# Altium PCB linkit-v4-0.3_6layers_kimonly.PcbDoc (part 5 of 5)
Units mm, origin at the board's own origin, x right, y up, seen from the top; angles counter-clockwise.
Board outline 70 x 35 mm, 6 copper layers (Top Layer, Int1 (GND), Int2 (Sign), Int3 (Sign), Int4 (PWR), Bottom Layer), stack 1.636 mm thick; 194 components, 149 nets, 738 pads, 717 vias.
Unrouted connection lines stored in the file: 1.
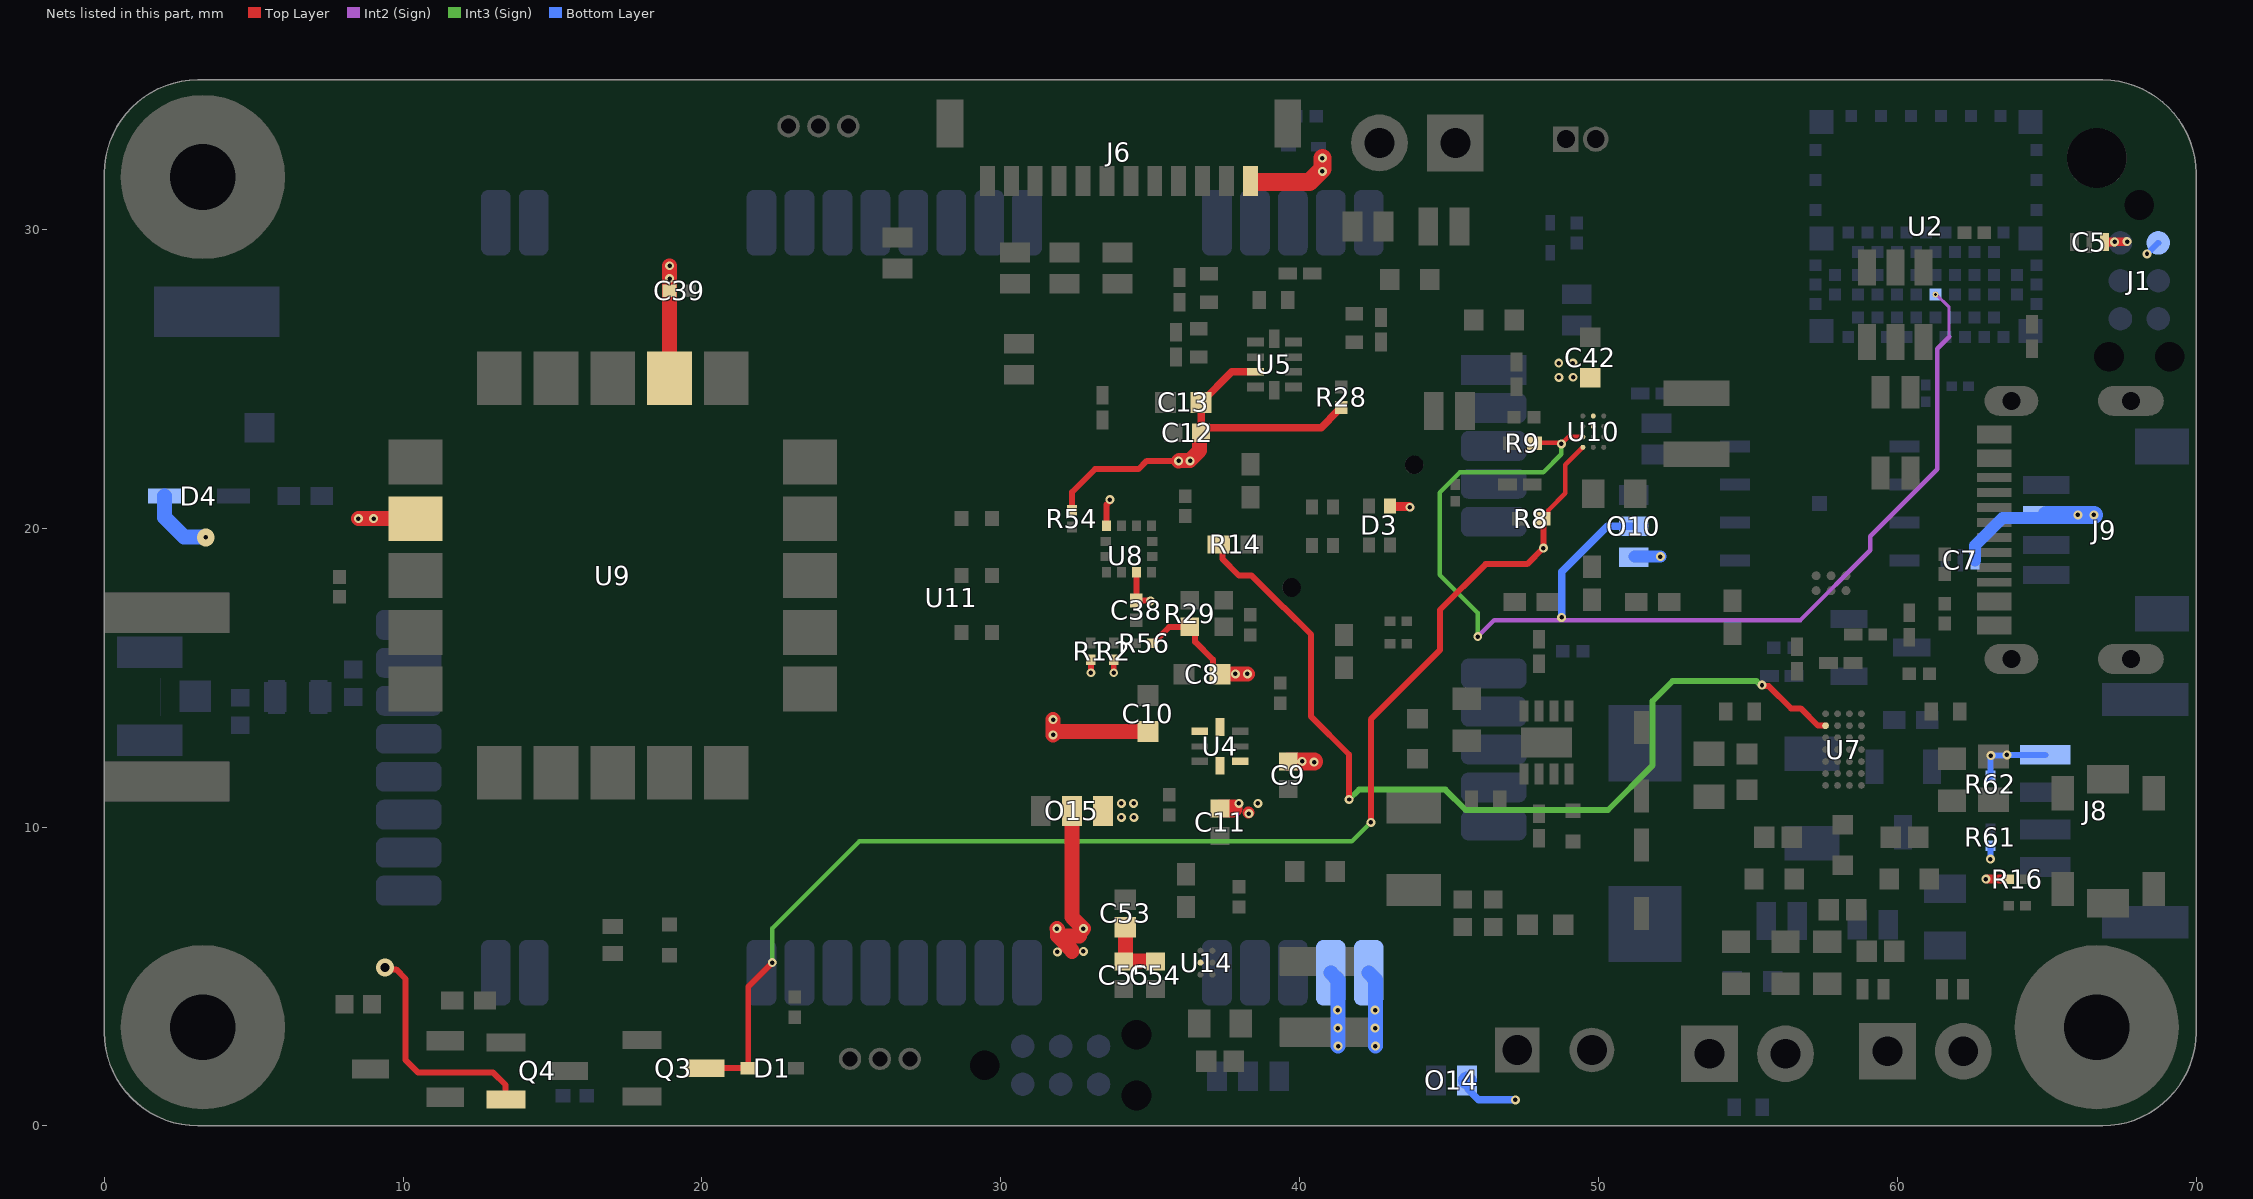
[diagram p8: the nets of this part, all layers, seen from the top]

## Via types
v1: diameter 0.3, hole 0.15, Int1 (GND) to Int3 (Sign), tented both sides, 165 vias
v2: diameter 0.3, hole 0.15, Top Layer to Int1 (GND), tented both sides, 113 vias
v3: diameter 0.3, hole 0.15, Top Layer to Int4 (PWR), tented both sides, 69 vias
v4: diameter 0.3, hole 0.15, Top Layer to Int3 (Sign), tented both sides, 64 vias
v5: diameter 0.3, hole 0.15, Int1 (GND) to Int2 (Sign), tented both sides, 39 vias
v6: diameter 0.6, hole 0.15, Int1 (GND) to Bottom Layer, tented both sides, 35 vias
v7: diameter 0.4/0.4/0.4/0.4 (per signal layer), hole 0.2, Top Layer to Bottom Layer, tented both sides, 31 vias
v8: diameter 0.3, hole 0.15, Int1 (GND) to Bottom Layer, tented both sides, 28 vias
v9: diameter 0.3, hole 0.15, Top Layer to Int2 (Sign), tented both sides, 21 vias
v10: diameter 0.3, hole 0.15, Int3 (Sign) to Bottom Layer, tented both sides, 20 vias
v11: diameter 0.3, hole 0.15, Int2 (Sign) to Int3 (Sign), tented both sides, 18 vias
v12: diameter 0.3, hole 0.15, Int4 (PWR) to Bottom Layer, tented both sides, 16 vias
v13: diameter 0.3, hole 0.15, Int2 (Sign) to Bottom Layer, tented both sides, 15 vias
v14: diameter 0.25, hole 0.1, Int3 (Sign) to Bottom Layer, tented both sides, 15 vias
v15: diameter 0.5, hole 0.2, Top Layer to Bottom Layer, tented both sides, 12 vias
v16: diameter 0.25, hole 0.1, Int2 (Sign) to Bottom Layer, tented both sides, 12 vias
v17: diameter 0.25, hole 0.1, Top Layer to Bottom Layer, tented both sides, 8 vias
v18: diameter 0.2, hole 0.1, Int2 (Sign) to Bottom Layer, tented both sides, 7 vias
v19: diameter 0.226, hole 0.1, Top Layer to Int3 (Sign), tented both sides, 6 vias
v20: diameter 0.4, hole 0.2, Top Layer to Bottom Layer, tented both sides, 6 vias
v21: diameter 0.6, hole 0.3, Top Layer to Bottom Layer, tented both sides, 4 vias
v22: diameter 0.25, hole 0.1, Int1 (GND) to Bottom Layer, tented both sides, 4 vias
v23: diameter 0.6, hole 0.15, Top Layer to Int2 (Sign), tented both sides, 2 vias
v24: diameter 0.6, hole 0.15, Int3 (Sign) to Bottom Layer, tented both sides, 2 vias
v25: diameter 0.3, hole 0.15, Top Layer to Bottom Layer, tented both sides, 2 vias
v26: diameter 0.6, hole 0.15, Int4 (PWR) to Bottom Layer, tented both sides, 1 vias
v27: diameter 0.25, hole 0.1, Int2 (Sign) to Int3 (Sign), tented both sides, 1 vias
v28: diameter 0.169, hole 0.1, Top Layer to Int2 (Sign), tented both sides, 1 vias

## Nets (pads, with @x,y where several pads share a name; then routed paths per layer and width w, separated by ;. In a path a pad name is that pad's centre, name@x,y a point inside that pad or via, vN(x,y) a via of type N, cw(c..) or ccw(c..) an arc to the next point about the centre after c; other vN are vias at no path point) (continued)
VCC_SEL: R9.1 U2.52 U10.B3 | length 36.2
  Top Layer w0.15: R9.1@47.864,22.837 47.882,22.855 48.723,22.855 v4(48.759,22.819) 48.999,23.058 U10.B3@49.461,23.058
  Int2 (Sign) w0.1: v18@61.308,27.824 61.737,27.395 61.737,26.403
  Int2 (Sign) w0.15: v11(45.962,16.374) 46.515,16.928 56.762,16.928 59.097,19.262 59.097,19.727 61.341,21.971 61.341,25.745 61.341,26.006 61.737,26.403 ; v18(61.285,27.824) v18@61.308,27.824
  Int3 (Sign) w0.15: v11(45.962,16.374) 45.962,17.163 44.683,18.442 44.683,20.228 44.683,20.666 44.683,21.188 45.368,21.873 48.162,21.873 48.759,22.47 v4(48.759,22.819)
VSAT: C53.2 C54.2 C55.2 O10.2 O15.2 U11.11@42.315,5.124 U11.12@41.045,5.124 U14.B2 | length 17.8
  Top Layer w0.5: v3(31.877,6.604) 31.896,6.585 31.896,6.358 32.385,5.869 32.385,5.842 ; 32.131,6.35 32.631,6.35 32.631,6.442 v3@32.76,6.571 ; O15.2@32.385,10.541 32.385,6.985 v3(32.766,6.604) ; C55.2@34.113,5.506 34.13,5.523 35.162,5.523 C54.2@35.179,5.54 ; C55.2@34.12,5.506 34.17,5.556 C53.2@34.17,6.645
  Bottom Layer w0.25: v12@48.787,17.037 v12(48.768,17.018) 48.768,18.542 50.292,20.066 O10.2@51.181,20.066
  Bottom Layer w0.5: U11.12@41.045,5.124 41.287,4.882 v12(41.287,2.669) ; U11.11@42.315,5.124 42.537,4.902 v12(42.537,2.669)
  other v3: 31.896,5.823 32.766,5.842
  other v12: 41.281,3.271 42.531,3.271 41.275,3.874 42.525,3.874
VSENS_1: C8.1 C12.2 C13.1 R28.1 R29.2 R54.2 R56.2 U4.4 U5.8 | length 18.8
  Top Layer w0.2: R54.2@32.385,20.6 32.385,21.209 33.157,21.981 34.618,21.981 34.887,22.251 v3(35.956,22.251) ; R56.2@35.078,16.155 35.098,16.155 35.638,16.695 R29.2@36.322,16.695 36.509,16.508 36.509,16.196 37.103,15.602 37.103,15.348 C8.1@37.338,15.113 ; C12.2@36.703,23.189 C12.2@36.705,23.191 ; R28.1@41.282,23.924 41.292,23.924 41.402,24.034 R28.1@41.402,24.044
  Top Layer w0.25: C12.2@36.705,23.191 C12.2@36.705,23.193 ; U5.8@38.521,25.228 37.726,25.228 C13.1@36.705,24.207 C12.2@36.705,23.193 ; R28.1@41.282,23.924 40.726,23.368 36.88,23.368 C12.2@36.705,23.193
  Top Layer w0.5: v3(35.956,22.251) 35.975,22.27 36.331,22.27 36.655,22.594 36.655,23.141 C12.2@36.703,23.189 ; C8.1@37.338,15.113 37.351,15.126 v3(38.257,15.126)
  other v3: 37.849,15.126 36.339,22.251
VSENS_2: C10.1 C39.1 D4.2 U4.5 U9.2 U9.17 | length 11.8
  Top Layer w0.5: v3(8.509,20.32) 10.413,20.32 U9.2@10.418,20.315 ; U9.17@18.918,25.015 18.918,27.952 v3(18.918,28.782) ; v3(31.75,13.596) v3(31.75,13.081) 31.873,13.204 34.825,13.204 34.829,13.2 C10.1@34.925,13.2
  Bottom Layer w0.5: D4.2@2.023,21.074 2.023,20.36 2.671,19.712 3.38,19.712 v26(3.399,19.693)
  other v3: 9.017,20.32 18.918,28.35
VSYS: C5.1 C7.1 C9.2 C11.2 C38.2 C42.1 D3.1 J1.1 J6.1 J8.1 J9.2 O10.3 O14.1 O15.3 Q4.2 R1.2 R2.2 R16.2 R61.2 R62.1 U4.1 U4.8 U8.3 U8.10 U10.C2 U10.D2 | length 29.2
  Top Layer w0.2: v21(9.39,5.306) 9.459,5.238 9.77,5.238 10.091,4.917 10.091,2.197 10.496,1.792 13.009,1.792 13.428,1.373 13.428,0.903 Q4.2@13.441,0.89 ; v3(33.02,15.163) R1.2@33.02,15.595 ; U8.10@33.54,20.079 33.54,20.786 33.655,20.901 v3(33.655,20.955) ; R2.2@33.772,15.571 33.782,15.561 v3(33.782,15.163) ; U8.3@34.54,18.529 34.54,17.586 C38.2@34.537,17.582 34.545,17.573 35.008,17.573 v3(35.017,17.564) ; C9.2@39.624,12.2 C9.2@39.632,12.192 ; v3(67.273,29.579) v3@67.279,29.585 ; v3@67.685,29.585 v3(67.691,29.591)
  Top Layer w0.252: R2.2@33.772,15.571 33.772,15.585 R2.2@33.782,15.595 ; R16.2@63.554,8.255 R16.2@63.728,8.255
  Top Layer w0.3: R2.2@33.772,15.572 R2.2@33.788,15.589 ; D3.1@43.022,20.742 43.043,20.721 43.668,20.721 v3(43.688,20.701) ; v3@63.007,8.255 R16.2@63.554,8.255 ; C5.1@66.929,29.576 66.929,29.579 v3(67.273,29.579) ; v3@67.279,29.585 v3@67.685,29.585
  Top Layer w0.4: v3@38.283,10.485 v3@38.298,10.485
  Top Layer w0.5: O15.3@33.426,10.541 33.426,10.696 O15.3@33.507,10.776
  Top Layer w0.6: C11.2@37.338,10.62 37.798,10.62 ; J6.1@38.404,31.582 40.334,31.582 40.767,32.015 v3(40.767,32.385) ; C9.2@39.632,12.192 39.639,12.199 v3@40.491,12.199
  Bottom Layer w0.2: O10.3@51.181,19.025 O10.3@51.206,19.05 ; R62.1@63.059,11.639 63.119,11.699 R62.1@63.119,11.71 63.127,11.718 63.127,12.383 v12(63.135,12.391) 63.145,12.401 63.658,12.401 v12(63.668,12.411) 64.948,12.411 J8.1@64.952,12.416 ; v12(63.119,8.927) R61.2@63.119,9.372 R61.2@63.119,9.352 ; v12(68.356,29.18) 68.363,29.18 68.729,29.546 J1.1@68.736,29.546
  Bottom Layer w0.25: O14.1@45.636,1.494 45.636,1.222 45.987,0.871 v12(47.223,0.871)
  Bottom Layer w0.4: O10.3@51.206,19.05 v12(52.07,19.05) ; C7.1@62.603,18.923 62.603,19.423 63.519,20.339 64.887,20.339 J9.2@64.987,20.439
  Bottom Layer w0.6: O14.1@45.606,1.524 O14.1@45.636,1.494 ; J9.2@64.987,20.439 v12@66.579,20.439
  other v3: 62.962,8.255 34.038,10.327 34.452,10.327 38.303,10.451 34.036,10.795 34.451,10.795 37.973,10.795 38.608,10.795 40.491,12.175 40.087,12.199 48.677,25.048 49.152,25.051 48.673,25.524 49.149,25.527 40.767,31.943
  other v12: 66.04,20.447 66.579,20.442
VSYS_EN: D1.1 Q3.3 R8.2 U10.A3 | length 44.3
  Top Layer w0.15: R8.2@48.175,20.32 48.177,20.32 48.327,20.47 48.327,20.596 48.895,21.164 48.895,22.124 U10.A3@49.478,22.707
  Top Layer w0.2: Q3.3@20.1,1.93 D1.1@21.552,1.93 21.552,4.662 v4(22.355,5.465) ; v4(42.383,10.155) 42.383,13.606 44.696,15.919 44.696,17.264 46.228,18.796 47.617,18.796 v9(48.158,19.337) 48.165,19.344 48.165,20.307 R8.2@48.152,20.32
  Int3 (Sign) w0.15: v4(22.355,5.465) 22.355,6.607 25.273,9.525 41.753,9.525 v4(42.383,10.155)
WIRELESS_NCHG_LED: R14.1 U7.F4 | length 30.6
  Top Layer w0.2: R14.1@37.296,19.457 37.414,19.339 37.414,18.974 37.973,18.415 38.395,18.415 39.458,17.352 39.476,17.352 40.386,16.442 40.386,13.696 41.656,12.426 v4(41.656,10.922) ; v4(55.474,14.751) 55.512,14.713 55.7,14.713 56.443,13.97 56.769,13.97 57.347,13.392 U7.F4@57.601,13.392
  Int3 (Sign) w0.2: v4(41.656,10.922) 41.987,11.253 44.877,11.253 45.559,10.572 50.323,10.572 51.816,12.065 51.816,14.219 52.482,14.885 55.286,14.885 55.419,14.751 v4(55.474,14.751)
pads on no net: J1.H1 J1.H2 J1.H3 J4.A8 J4.B8 J9.S1 J9.S2 J12.H1 J12.H2 J12.H3 MEC1.1 MEC1.2 MH1.0 Q5.B1 Q5.B2 U2.15 U2.59 U2.65 U2.66 U2.67 U2.68 U2.69 U2.70 U2.71 U2.72 U2.73 U2.74 U2.75 U2.76 U2.77 U2.78 U8. U8.4 U8.11 U11.1@45.895,25.294 U11.2@45.895,24.024 U11.3@45.895,22.754 U11.4@45.895,21.484 U11.5@45.895,20.214 U11.6@45.895,15.134 U11.7@45.895,13.864 U11.8@45.895,12.594 U11.9@45.895,11.324 U11.10@45.895,10.054 U11.11@42.315,5.724 U11.12@41.045,5.724 U11.13@39.775,5.724 U11.14@38.505,5.724 U11.15@37.235,5.724 U11.16@30.884,5.724 U11.17@29.615,5.724 U11.18@28.345,5.724 U11.19@27.074,5.724 U11.20 U11.21@24.535,5.724 U11.22 U11.23 U11.24@14.375,5.724 U11.25 U11.26@10.795,7.874 U11.27 U11.28 U11.29@10.795,11.684 U11.30@10.795,12.954 U11.31@10.795,14.224 U11.32@10.795,15.494 U11.33@10.795,16.764 U11.34@13.105,29.624 U11.35@14.375,29.624 U11.36@21.995,29.624 U11.37@23.265,29.624 U11.38@24.535,29.624 U11.39@25.805,29.624 U11.40@27.075,29.624 U11.41@28.345,29.624 U11.42@29.615,29.624 U11.43@30.885,29.624 U11.44 U11.45@38.505,29.624 U11.46 U11.47@41.045,29.624 U11.48

## Polygon pours and split planes (outlines as drawn)
GND on Bottom Layer "BOTGND" (solid, remove dead copper, pour order 4): 0,33.113 0,1.778 1.905,-0.127 67.945,-0.127 70.104,1.905 70,33.224 68.58,34.874 1.454,34.874
GND on Top Layer "TOPGND" (solid, remove dead copper, pour order 0): 0,2.032 1.651,0 68.143,0 70,1.858 70,33.142 68.081,35.061 1.506,35 0,33.274
GND on Int2 (Sign) "L2_GND" (solid, remove dead copper, pour order 2): 0.001,33.009 -0.108,1.924 1.817,0 68.072,0 70,2.113 70,33.332 68.326,35.052 1.723,35.001
GND on Int3 (Sign) "L3_GND" (solid, remove dead copper, pour order 3): 0,33.098 0,1.655 1.882,0 68.072,0 70,2.032 70,33.191 68.487,35.001 1.767,35
VSYS on Int4 (PWR) (split plane): 239 vertices, not listed, extent 0.509,0.509 69.491,34.491
GND on Int4 (PWR) (split plane): 13.006,10.244 12.997,10.235 0.51,10.235 0.51,13.416 11.916,13.416 11.916,14.627 11.916,15.266 0.51,15.261 0.51,18.848 8.972,18.848 9.024,18.855 9.073,18.875 9.114,18.907 9.464,19.257 10.061,19.257 10.113,19.264 10.162,19.284 10.203,19.316 10.684,19.796 13.006,22.119
VSENS_2 on Int4 (PWR) (split plane): 32.383,17.37 32.383,12.983 32.174,12.775 31.072,12.775 30.174,13.673 30.174,16.032 30.167,16.084 30.147,16.132 30.115,16.174 18.841,27.448 18.799,27.48 18.751,27.5 18.699,27.507 17.907,27.507 17.855,27.5 17.806,27.48 17.764,27.448 10.398,20.082 9.977,19.661 9.381,19.661 9.328,19.654 9.28,19.634 9.238,19.601 8.888,19.252 0.51,19.252 0.51,21.561 0.719,21.769 8.89,21.769 8.942,21.776 8.991,21.796 9.033,21.828 16.975,29.77 19.982,29.77
VSAT on Int4 (PWR) (split plane): 49.393,17.378 49.393,16.912 45.831,13.351 45.799,13.309 45.779,13.26 45.772,13.208 45.772,7.958 43.291,5.477 43.259,5.435 43.239,5.386 43.232,5.334 43.232,2.257 40.664,2.257 38.383,4.537 38.341,4.569 38.293,4.589 38.241,4.596 36.758,4.596 36.17,5.184 36.128,5.216 36.079,5.237 36.027,5.243 31.806,5.243 30.973,6.076 30.973,7.545 42.018,7.545 42.07,7.552 42.118,7.572 42.16,7.604 44.084,9.528 44.116,9.57 44.136,9.619 44.143,9.671 44.143,13.248 48.727,17.832 48.938,17.832
VBAT on Int4 (PWR) (split plane): 43.727,26.092 43.769,26.06 43.817,26.04 43.87,26.033 45.945,26.033 49.455,22.522 49.455,21.717 49.455,21.665 49.462,21.613 49.482,21.564 49.514,21.522 50.682,20.354 50.682,15.407 48.244,12.97 48.212,12.928 48.192,12.879 48.185,12.827 48.185,11.176 48.192,11.124 48.212,11.075 48.244,11.033 49.006,10.271 49.048,10.239 49.097,10.219 49.149,10.212 57.15,10.212 57.202,10.219 57.251,10.239 57.293,10.271 58.631,11.609 61.782,11.609 61.782,10.233 61.747,10.228 61.698,10.208 61.657,10.176 58.716,7.235 49.705,7.235 49.653,7.228 49.605,7.208 49.563,7.176 45.831,3.445 45.799,3.403 45.779,3.354 45.772,3.302 45.772,0.511 6.933,0.511 6.933,2.71 7.084,2.862 9.308,2.862 9.36,2.869 9.408,2.889 9.45,2.921 11.916,5.386 31.092,5.386 31.58,4.899 31.621,4.867 31.67,4.847 31.722,4.84 35.943,4.84 36.531,4.252 36.573,4.22 36.622,4.2 36.674,4.193 38.157,4.193 40.437,1.913 40.479,1.88 40.528,1.86 40.58,1.853 43.434,1.853 43.486,1.86 43.535,1.88 43.577,1.913 43.609,1.954 43.629,2.003 43.636,2.055 43.636,5.25 46.117,7.731 46.149,7.773 46.155,7.787 46.169,7.822 46.176,7.874 46.176,13.124 49.737,16.686 49.769,16.728 49.79,16.777 49.796,16.829 49.796,17.461 49.79,17.513 49.769,17.562 49.737,17.604 49.165,18.177 49.123,18.209 49.074,18.229 49.022,18.236 48.644,18.236 48.591,18.229 48.557,18.215 48.543,18.209 48.501,18.177 47.944,17.619 45.541,20.023 45.541,22.225 45.534,22.277 45.514,22.326 45.482,22.368 43.577,24.273 43.535,24.305 43.486,24.325 43.434,24.332 41.74,24.332 35.762,30.31 35.762,30.904 36.152,31.294 38.524,31.294
VSENS_1 on Int4 (PWR) (split plane): 37.898,21.633 37.898,18.479 37.898,16.418 37.905,16.366 37.925,16.317 37.957,16.275 38.66,15.572 38.66,14.562 38.143,14.045 38.057,14.045 36.651,15.451 36.651,17.081 36.644,17.134 36.624,17.182 36.592,17.224 35.524,18.292 35.524,22.912 36.619,22.912
VBUS on Int4 (PWR) (split plane): 64.949,23.538 64.949,21.166 60.07,16.286 57.574,13.791 56.853,13.791 54.177,16.467 54.177,18.948 59.406,18.948 59.458,18.954 59.507,18.975 59.549,19.007 64.216,23.674 64.813,23.674
VBUS on Int1 (GND) (split plane): 60.13,30.095 60.123,30.043 60.123,29.555 60.13,29.503 60.15,29.454 60.182,29.412 60.377,29.217 60.377,28.448 60.377,25.897 60.384,25.845 60.404,25.796 60.436,25.754 62.649,23.541 62.691,23.509 62.739,23.489 62.792,23.482 64.497,23.482 65.053,22.927 65.053,21.841 63.331,21.841 59.13,26.042 59.13,29.623 59.123,29.675 59.103,29.724 59.071,29.765 59.03,29.797 59.03,30.099 60.132,30.099
AGND on Int1 (GND) (split plane): 42.814,29.037 42.814,27.859 41.191,26.237 36.66,26.237 36.465,26.432 35.762,27.135 35.762,28.872 36.406,29.516 42.334,29.516
PGND1 on Int1 (GND) (split plane): 48.498,27.289 48.54,27.257 48.589,27.237 48.641,27.23 51.097,27.23 52.122,26.205 52.122,20.658 51.605,20.141 47.328,20.141 46.049,21.42 46.049,26.713 47.201,27.865 47.922,27.865
PGND2 on Int1 (GND) (split plane): 40.438,9.187 40.438,7.568 38.481,7.568 38.429,7.561 38.38,7.541 38.338,7.509 37.449,6.62 37.417,6.578 37.397,6.529 37.39,6.477 37.39,2.624 36.619,1.853 34.882,1.853 33.301,3.434 33.301,4.955 33.301,5.837 33.417,5.953 33.449,5.995 33.469,6.044 33.476,6.096 33.476,7.917 35.263,9.704 39.921,9.704
GND on Int1 (GND) (split plane): 3.125,34.49 51.943,34.49 51.943,30.099 58.826,30.099 58.826,29.797 58.785,29.765 58.753,29.724 58.733,29.675 58.726,29.623 58.726,25.959 58.733,25.907 58.753,25.858 58.785,25.816 63.105,21.497 63.147,21.465 63.195,21.445 63.247,21.438 65.255,21.438 65.307,21.445 65.355,21.465 65.397,21.497 65.429,21.539 65.449,21.587 65.456,21.639 65.456,23.01 65.449,23.063 65.435,23.097 65.429,23.111 65.397,23.153 64.724,23.827 64.682,23.859 64.633,23.879 64.581,23.886 62.875,23.886 60.781,25.98 60.781,28.448 60.781,29.301 60.774,29.353 60.754,29.402 60.722,29.443 60.526,29.639 60.526,30.043 60.52,30.093 60.525,30.099 69.49,30.099 69.49,3.125 69.491,3.113 69.482,2.92 69.452,2.691 69.402,2.466 69.333,2.247 69.245,2.034 69.138,1.829 69.015,1.635 68.874,1.452 68.718,1.282 68.548,1.126 68.366,0.986 68.171,0.862 67.967,0.755 67.754,0.667 67.534,0.598 67.309,0.548 67.08,0.518 66.885,0.509 66.875,0.51 3.125,0.511 3.115,0.51 2.92,0.518 2.691,0.548 2.466,0.598 2.247,0.668 2.034,0.756 1.829,0.862 1.635,0.986 1.452,1.126 1.282,1.282 1.126,1.452 0.986,1.635 0.862,1.829 0.755,2.034 0.667,2.247 0.598,2.467 0.548,2.692 0.518,2.92 0.509,3.115 0.51,3.126 0.51,3.301 0.51,3.304 0.51,31.875 0.509,31.885 0.518,32.081 0.548,32.309 0.598,32.534 0.667,32.754 0.756,32.967 0.862,33.171 0.986,33.366 1.126,33.549 1.282,33.719 1.452,33.874 1.635,34.015 1.829,34.139 2.034,34.245 2.247,34.333 2.466,34.403 2.691,34.453 2.92,34.483 3.113,34.491

## Other copper
Top Layer:
  rectangle net VSYS: 33.383,10.196 34.606,10.916
  rectangle net VSYS: 37.701,10.27 38.771,10.956
  rectangle net VBUS: 54.438,18.012 55.189,18.703
  pour cut-out: 46.863,24.765 46.848,24.75 46.848,23.542 49.699,23.542 49.655,24.765
  pour cut-out: 58.551,18.875 56.999,18.875 56.999,17.464 58.531,17.464
  pour cut-out: 59.759,14.039 59.781,14.017 59.781,11.669 56.769,11.669 56.769,14.017
  region net NetC58_1: 46.468,11.237 47.421,12.115 47.575,12.115 47.633,11.443 46.906,10.593 46.455,10.593
  pour cut-out: 43.815,6.394 39.301,6.394 39.382,3.938 39.382,3.828 43.815,3.828
  pour cut-out: 54.582,23.895 52.337,23.895 52.337,23.232 52.474,23.095 54.582,23.095
  region net VSYS: 49.911,23.4 49.911,23.801 49.911,24.205 50.074,24.368 50.074,25.29 49.285,25.623 49.227,25.681 48.499,25.681 48.499,25.458 48.499,25.235 48.499,24.938 49.05,24.788 49.167,24.754 49.455,24.501 49.746,24.211 49.746,23.4
  region net PGND4: 47.777,13.325 47.776,13.326 46.121,13.326 45.97,13.175 46.023,13.123 46.023,12.546 46.028,12.546 46.244,12.331 47.724,12.331
  region net NetC2_2: 47.498,13.589 47.169,13.918 45.793,13.918 45.793,14.17 45.909,14.608 47.388,14.608 47.631,14.365 47.631,13.709
  region net VSAT: 36.684,5.461 36.684,5.562 36.348,5.562 36.104,5.806 35.4,5.806 35.393,5.207 36.206,5.207 36.347,5.361 36.424,5.361 36.688,5.361
  region net NetC23_1: 57.514,11.702 57.988,11.702 58.001,11.896 57.58,11.896 56.854,11.896 56.388,11.43 56.388,7.747 57.377,6.902 57.785,6.985 57.514,7.469 57.023,7.874 57.023,11.176 57.111,11.442 57.331,11.662
  region net GND: 57.938,13.857 58.089,14.008 58.089,14.672 58.149,14.732 58.877,14.732 58.877,14.357 58.486,13.966 58.45,13.832 58.402,13.751 58.402,13.792 58.204,13.892 58.024,13.787
  region net VBAT: 45.402,24.319 45.212,24.55 45.212,25.4 46.162,25.4 46.162,24.625 45.855,24.319
  region net VSENS_2: 36.663,13.2 36.401,13.462 35.941,13.462 35.854,13.549 34.983,13.549 34.983,13.121 35.254,12.85 35.71,12.85 35.969,13.109 36.521,13.109
  region net LX2: 50.178,23.836 50.678,24.178 51.689,24.511 52.196,24.929 52.447,24.929 52.592,24.201 51.245,23.727 50.808,23.707 50.178,23.678
  pour cut-out: 51.943,30.099 51.943,35.306 69.85,35.306 69.85,30.226 69.977,30.099
  region net COIL-2: 58.867,11.703 58.405,11.709 58.396,11.903 58.822,11.903 59.548,11.903 60.014,11.436 60.014,7.753 58.895,6.9 58.617,6.991 58.822,7.5 59.379,7.88 59.379,11.182 59.291,11.448 59.071,11.668
  region net VSAT: 34.417,6.858 33.655,6.858 33.401,7.112 31.877,7.112 31.546,6.781 31.546,5.665 32.004,5.207 32.766,5.207 33.782,6.223 34.036,6.223 34.29,6.35
  region net VSYS: 37.338,12.05 37.338,11.901 37.489,11.75 37.489,11.068 37.638,10.918 37.638,10.499 37.04,10.499 37.04,10.927 37.188,11.075 37.188,12.058
  region net VSYS: 38.013,12.2 38.138,12.075 38.598,12.075 38.772,11.901 39.693,11.901 39.693,12.279 39.474,12.498 38.754,12.498 38.581,12.325 38.208,12.325
  region net VSENS_1: 37.338,13.35 37.338,13.499 37.187,13.65 37.187,14.332 36.989,14.531 36.989,14.901 37.66,14.901 37.687,14.875 37.687,14.524 37.488,14.325 37.488,13.342
  region net VBAT: 36.998,5.028 37.001,4.543 37.438,4.204 37.695,3.883 37.695,2.159 38.255,2.159 38.738,2.642 39.738,2.642 39.738,3.507 38.498,3.883 38.141,4.368 37.526,4.759 37.149,5.084
  region net NetL5_2: 37.096,5.463 37.096,5.38 37.345,5.38 38.508,5.015 39.692,5.015 39.692,5.993 39.69,5.994 38.213,5.994 37.345,5.537 37.096,5.537
  region net LX1: 50.177,22.632 50.658,22.309 51.741,22.19 52.201,22.068 52.502,22.085 52.62,22.89 51.98,22.894 51.279,22.828 51.056,22.791 50.397,22.791 50.177,22.791
  region net VBAT: 49.747,22.71 49.745,22.707 49.745,22.258 49.454,21.967 49.454,18.711 50.202,18.711 50.202,21.963 49.912,22.254 49.912,22.705
  region net VBUS: 57.513,13.775 57.066,14.222 57.066,14.792 57.823,14.792 57.823,14.075 57.694,13.946 57.694,13.768
  region net VBUS: 58.557,18.661 58.312,18.661 58.166,18.506 58.142,18.393 58.144,18.393 58.241,18.268 58.453,18.167 58.537,18.163
  region net RX-OUT: 58.805,12.496 58.802,12.493 56.062,12.493 55.672,12.102 54.703,12.102 54.703,12.182 55.314,12.793 56.803,12.793 56.905,12.691 58.809,12.691 58.801,12.682 58.801,12.592
  region net PGND3: 57.705,11.441 58.891,11.441 58.891,10.068 58.459,9.636 57.951,9.636 57.51,10.076 57.51,11.364
Int2 (Sign):
  pour cut-out: 51.943,30.099 51.943,35.306 69.85,35.306 69.85,30.226 69.977,30.099
Int3 (Sign):
  region net NetC23_1: 54.86,6.815 54.502,6.457 53.054,7.941 53.518,8.169
  pour cut-out: 51.943,30.099 51.943,35.306 69.85,35.306 69.85,30.226 69.977,30.099
Bottom Layer:
  rectangle net NetC49_2: 3.447,13.854 4.087,14.903
  pour cut-out: 6.707,13.576 6.247,13.576 6.247,15.126 6.707,15.126
  pour cut-out: 2.54,15.367 2.54,13.335 0.508,13.335 0.508,15.367
  region net GND: 9.411,15.414 8.177,15.424 7.547,15.368 7.639,15.276 7.865,15.276 7.865,15.024 9.507,15.024 9.653,15.161
  pour cut-out: 51.943,30.099 51.943,35.306 69.85,35.306 69.85,30.226 69.977,30.099
  pour cut-out: 57.46,26.472 64.587,26.472 64.587,29.572 64.46,29.699 57.46,29.699
  pour cut-out: 11.176,29.056 11.176,6.223 17.272,6.223 45.339,6.223 45.339,29.21
Int1 (GND) (plane layer: these items are gaps in the copper):
  pour cut-out: 51.943,30.099 51.943,35.306 69.85,35.306 69.85,30.226 69.977,30.099
  lines w0.2: 58.928,29.623 58.928,30.48 59.055,30.607 59.309,30.607 60.579,30.607 60.579,30.297 60.325,30.043
  lines w0.4: 58.928,29.623 58.928,25.959 63.247,21.639 65.255,21.639 65.255,23.01 64.581,23.684 62.792,23.684 60.579,25.897 60.579,28.448 60.579,29.301 60.325,29.555 60.325,30.043 ; 33.099,3.35 33.099,4.955 33.099,5.921 33.274,6.096 33.274,8.001 35.179,9.906 40.005,9.906 40.64,9.271 40.64,7.366 38.481,7.366 37.592,6.477 37.592,2.54 36.703,1.651 34.798,1.651 33.099,3.35 ; 35.56,27.051 36.322,26.289 36.576,26.035 41.275,26.035 43.016,27.776 43.016,29.12 42.418,29.718 36.322,29.718 35.56,28.956 35.56,27.051 ; 45.847,21.336 47.244,19.939 51.689,19.939 52.324,20.574 52.324,26.289 51.181,27.432 48.641,27.432 48.006,28.067 47.117,28.067 45.847,26.797 45.847,21.336
Int4 (PWR) (plane layer: these items are gaps in the copper):
  region: 58.404,22.328 56.404,22.328 56.404,19.328 58.404,19.328
  region: 57.277,30.48 57.277,24.556 65.024,24.556 65.024,25.908 65.024,30.353
  pour cut-out: 51.943,30.099 51.943,35.306 69.85,35.306 69.85,30.226 69.977,30.099
  pour cut-out: -0.381,15.261 11.916,15.266 11.916,14.627 11.916,13.416 -0.381,13.416
  lines w0.4: 0,10.033 13.081,10.033 13.208,10.16 13.208,22.479 ; 6.223,0 6.731,0 6.731,2.794 7,3.063 9.308,3.063 11.832,5.588 31.115,5.588 ; 45.974,-0.064 45.974,3.302 49.705,7.033 58.8,7.033 61.799,10.033 61.984,10.033 61.984,11.811 58.547,11.811 57.15,10.414 51.943,10.414 49.149,10.414 48.387,11.176 48.387,12.827 50.884,15.324 50.884,20.438 49.657,21.665 ; 47.879,17.399 45.339,19.939 45.339,22.225 43.434,24.13 41.656,24.13 35.56,30.226 35.56,30.988 36.068,31.496 38.608,31.496 43.87,26.234 46.029,26.234 49.657,22.606 ; 49.657,21.665 49.657,21.717 49.657,22.606 ; 49.657,21.665 49.657,22.606 ; 0.254,19.05 8.972,19.05 9.381,19.459 10.061,19.459 10.541,19.939 17.907,27.305 18.699,27.305 29.972,16.032 29.972,13.589 30.988,12.573 32.258,12.573 32.585,12.9 32.585,17.453 20.066,29.972 16.891,29.972 8.89,21.971 2.032,21.971 0.635,21.971 0.254,21.59 0.254,19.05 ; 30.771,5.993 31.722,5.042 36.027,5.042 36.674,4.395 38.241,4.395 40.58,2.055 43.434,2.055 43.434,5.334 45.974,7.874 45.974,13.208 49.595,16.829 49.595,17.461 49.022,18.034 48.644,18.034 43.941,13.332 43.941,9.671 42.018,7.747 35.814,7.747 30.771,7.747 30.771,5.993 ; 35.322,18.208 36.449,17.081 36.449,15.367 37.973,13.843 38.227,13.843 38.862,14.478 38.862,15.656 38.1,16.418 38.1,18.479 38.1,21.717 36.703,23.114 35.814,23.114 35.322,23.114 35.322,18.208 ; 53.975,16.383 53.975,19.149 59.406,19.149 64.133,23.876 64.897,23.876 65.151,23.622 65.151,21.082 60.213,16.144 57.658,13.589 56.769,13.589 53.975,16.383

## Silkscreen, mask and mechanical layers (free items; w line width, h text height)
Top Overlay:
  drawing of 108 lines, arcs and shapes, not listed
  text "-" at 42.926,35.071 h0.8 r180
  text "+" at 45.72,34.931 h0.8 r180
  text "1" at 39.266,30.122 h1
  text "Argos Linkit V4.0" at 7.239,7.493 h2.5
  text "Reed switch" at 8.001,4.826 h1
  text "UART GPS" at 24.123,3.295 h0.8
  text "+" at 51.087,2.109 h1
  text "+" at 59.203,0.017 h1
  text "-" at 56.161,-0.294 h1.52
  text "-" at 62.097,-0.319 h1.52
Bottom Overlay:
  lines w0.15: 51.96,34.486 51.96,30.094 56.731,30.094 ; 65.189,30.094 67.308,30.094 ; 67.624,30.094 68.578,30.094 ; 68.894,30.094 69.925,30.094
  text "SAT UART" at 21.978,32.505 h0.8
  text "-" at 46.609,0 h1.52
  text "+" at 49.276,0 h1.52
Bottom Paste:
  rectangle: 3.4,13.852 4.126,14.902
Mechanical 3:
  drawing of 366 lines, arcs and shapes, not listed
  text "Layer" at 4.036,102.362 h1.52
  text "Name" at 10.405,102.362 h1.52
  text "Material" at 26.639,102.362 h1.52
  text "Thickness" at 38.636,102.362 h1.52
  text "Constant" at 47.723,102.362 h1.52
  text "Board Layer Stack" at 56.138,102.362 h1.52
  text "Top Overlay" at 10.405,99.314 h1.52
  text "Top Solder" at 10.405,96.266 h1.52
  text "SM-003" at 26.639,96.266 h1.52
  text "0,025mm" at 38.636,96.266 h1.52
  text "4" at 47.723,96.266 h1.52
  text "Top Surface Finish" at 10.405,93.218 h1.52
  text "Nickel, Gold" at 26.639,93.218 h1.52
  text "0,004mm" at 38.636,93.218 h1.52
  text "1" at 4.036,90.17 h1.52
  text "Top Layer" at 10.405,90.17 h1.52
  text "CF-004" at 26.639,90.17 h1.52
  text "0,035mm" at 38.636,90.17 h1.52
  text "Dielectric 1" at 10.405,87.122 h1.52
  text "S1000-2MB" at 26.639,87.122 h1.52
  text "0,050mm" at 38.636,87.122 h1.52
  text "4.25" at 47.723,87.122 h1.52
  text "Dielectric 2" at 10.405,84.074 h1.52
  text "S1000-2MB" at 26.639,84.074 h1.52
  text "0,050mm" at 38.636,84.074 h1.52
  text "4.25" at 47.723,84.074 h1.52
  text "2" at 4.034,81.026 h1.52
  text "Int1 (GND)" at 10.405,81.026 h1.52
  text "CF-004" at 26.639,81.026 h1.52
  text "0,018mm" at 38.636,81.026 h1.52
  text "Dielectric 3" at 10.405,77.978 h1.52
  text "S1000-2MB" at 26.639,77.978 h1.52
  text "0,050mm" at 38.636,77.978 h1.52
  text "4.25" at 47.723,77.978 h1.52
  text "Dielectric 4" at 10.405,74.93 h1.52
  text "S1000-2MB" at 26.639,74.93 h1.52
  text "0,050mm" at 38.636,74.93 h1.52
  text "4.25" at 47.723,74.93 h1.52
  text "3" at 4.036,71.882 h1.52
  text "Int2 (Sign)" at 10.405,71.882 h1.52
  text "CF-004" at 26.639,71.882 h1.52
  text "0,035mm" at 38.636,71.882 h1.52
  text "Dielectric 5" at 10.405,68.834 h1.52
  text "Core-001-HCC" at 26.639,68.834 h1.52
  text "1,065mm" at 38.636,68.834 h1.52
  text "4.25" at 47.723,68.834 h1.52
  text "4" at 4.036,65.786 h1.52
  text "Int3 (Sign)" at 10.405,65.786 h1.52
  text "CF-004" at 26.639,65.786 h1.52
  text "0,035mm" at 38.636,65.786 h1.52
  text "Dielectric 6" at 10.405,62.738 h1.52
  text "S1000-2MB" at 26.639,62.738 h1.52
  text "0,050mm" at 38.636,62.738 h1.52
  text "4.25" at 47.723,62.738 h1.52
  text "Dielectric 7" at 10.405,59.69 h1.52
  text "S1000-2MB" at 26.639,59.69 h1.52
  text "0,050mm" at 38.636,59.69 h1.52
  text "4.25" at 47.723,59.69 h1.52
  text "5" at 4.036,56.642 h1.52
  text "Int4 (PWR)" at 10.405,56.642 h1.52
  text "CF-004" at 26.639,56.642 h1.52
  text "0,018mm" at 38.636,56.642 h1.52
  text "Dielectric 8" at 10.405,53.594 h1.52
  text "S1000-2MB" at 26.639,53.594 h1.52
  text "0,050mm" at 38.636,53.594 h1.52
  text "4.25" at 47.723,53.594 h1.52
  text "Dielectric 9" at 10.405,50.546 h1.52
  text "S1000-2MB" at 26.639,50.546 h1.52
  text "0,050mm" at 38.636,50.546 h1.52
  text "4.25" at 47.723,50.546 h1.52
  text "6" at 4.036,47.498 h1.52
  text "Bottom Layer" at 10.405,47.498 h1.52
  text "CF-004" at 26.639,47.498 h1.52
  text "0,035mm" at 38.636,47.498 h1.52
  text "Bottom Surface Finish" at 10.405,44.45 h1.52
  text "Nickel, Gold" at 26.639,44.45 h1.52
  text "0,004mm" at 38.636,44.45 h1.52
  text "Bottom Solder" at 10.405,41.402 h1.52
  text "SM-003" at 26.639,41.402 h1.52
  text "0,025mm" at 38.636,41.402 h1.52
  text "4" at 47.723,41.402 h1.52
  text "Bottom Overlay" at 10.405,38.354 h1.52
Mechanical 8:
  lines w0.254: 4.826,-0.762 40.326,-0.762 40.326,34.738 4.826,34.738 4.826,-0.762
Mechanical 12:
  lines w0.1: 0,3.301 0,3.126 ccw(c3.15,3.151) 3.125,0 66.875,0 ccw(c66.85,3.15) 70,3.125 70,6.425 70,31.875 ccw(c66.85,31.85) 66.875,35.001 ; 0,3.302 0,31.875 cw(c3.15,31.85) 3.125,35.001 ; 3.125,35 66.875,35
Drill Drawing:
  drawing of 158 lines, arcs and shapes, not listed
  text "Symbol" at 83.197,89.036 h1.83
  text "Count" at 89.318,89.036 h1.83
  text "Hole Size" at 94.642,89.036 h1.83
  text "Plated" at 106.195,89.036 h1.83
  text "Hole Type" at 111.613,89.036 h1.83
  text "Drill Layer Pair" at 119.35,89.036 h1.83
  text "Via/Pad" at 133.685,89.036 h1.83
  text "Pad Shape" at 140.081,89.036 h1.83
  text "Template" at 148.333,89.036 h1.83
  text "Description" at 164.208,89.036 h1.83
  text "Hole Tolerance (+)" at 172.502,89.036 h1.83
  text "Hole Tolerance (-)" at 185.181,89.036 h1.83
  text "Hole Length" at 197.528,89.036 h1.83
  text "Routed Path Length" at 208.997,89.036 h1.83
  text "1" at 89.318,85.928 h1.52
  text "2.000mm (78.74mil)" at 94.642,85.928 h1.52
  text "NPTH" at 106.195,85.928 h1.52
  text "Round" at 111.613,85.928 h1.52
  text "Top Layer - Bottom Layer" at 119.35,85.928 h1.52
  text "Pad" at 133.685,85.928 h1.52
  text "Rounded" at 140.081,85.928 h1.52
  text "c200hn200m200" at 148.333,85.928 h1.52
  text "-" at 197.528,85.928 h1.52
  text "-" at 208.997,85.928 h1.52
  text "2" at 89.318,82.82 h1.52
  text "0.150mm (5.91mil)" at 94.642,82.82 h1.52
  text "PTH" at 106.195,82.82 h1.52
  text "Round" at 111.613,82.82 h1.52
  text "Top Layer - Bottom Layer" at 119.35,82.82 h1.52
  text "Via" at 133.685,82.82 h1.52
  text "Rounded" at 140.081,82.82 h1.52
  text "v30h15m0mx0" at 148.333,82.82 h1.52
  text "-" at 197.528,82.82 h1.52
  text "-" at 208.997,82.82 h1.52
  text "2" at 89.318,79.712 h1.52
  text "0.600mm (23.62mil)" at 94.642,79.712 h1.52
  text "PTH" at 106.195,79.712 h1.52
  text "Round" at 111.613,79.712 h1.52
  text "Top Layer - Bottom Layer" at 119.35,79.712 h1.52
  text "Pad" at 133.685,79.712 h1.52
  text "(Mixed)" at 140.081,79.712 h1.52
  text "(Mixed)" at 148.333,79.712 h1.52
  text "-" at 197.528,79.712 h1.52
  text "-" at 208.997,79.712 h1.52
  text "2" at 89.318,76.604 h1.52
  text "0.600mm (23.62mil)" at 94.642,76.604 h1.52
  text "PTH" at 106.195,76.604 h1.52
  text "Slot" at 111.613,76.604 h1.52
  text "Top Layer - Bottom Layer" at 119.35,76.604 h1.52
  text "Pad" at 133.685,76.604 h1.52
  text "Rounded" at 140.081,76.604 h1.52
  text "r180_100h60_140r50m0mx0" at 148.333,76.604 h1.52
  text "1.400mm (55.12mil)" at 197.528,76.604 h1.52
  text "0.800mm (31.50mil)" at 208.997,76.604 h1.52
  text "2" at 89.318,73.496 h1.52
  text "0.600mm (23.62mil)" at 94.642,73.496 h1.52
  text "PTH" at 106.195,73.496 h1.52
  text "Slot" at 111.613,73.496 h1.52
  text "Top Layer - Bottom Layer" at 119.35,73.496 h1.52
  text "Pad" at 133.685,73.496 h1.52
  text "Rounded" at 140.081,73.496 h1.52
  text "r220_100h60_180r50m0mx0" at 148.333,73.496 h1.52
  text "1.800mm (70.87mil)" at 197.528,73.496 h1.52
  text "1.200mm (47.24mil)" at 208.997,73.496 h1.52
  text "2" at 89.318,70.388 h1.52
  text "0.620mm (24.41mil)" at 94.642,70.388 h1.52
  text "NPTH" at 106.195,70.388 h1.52
  text "Round" at 111.613,70.388 h1.52
  text "Top Layer - Bottom Layer" at 119.35,70.388 h1.52
  text "Pad" at 133.685,70.388 h1.52
  text "Rounded" at 140.081,70.388 h1.52
  text "c62hn62m42p0" at 148.333,70.388 h1.52
  text "-" at 197.528,70.388 h1.52
  text "-" at 208.997,70.388 h1.52
  text "3" at 89.318,67.28 h1.52
  text "2.200mm (86.61mil)" at 94.642,67.28 h1.52
  text "PTH" at 106.195,67.28 h1.52
  text "Round" at 111.613,67.28 h1.52
  text "Top Layer - Bottom Layer" at 119.35,67.28 h1.52
  text "Pad" at 133.685,67.28 h1.52
  text "Rounded" at 140.081,67.28 h1.52
  text "c550h220m0mx0" at 148.333,67.28 h1.52
  text "-" at 197.528,67.28 h1.52
  text "-" at 208.997,67.28 h1.52
  text "4" at 89.318,64.172 h1.52
  text "0.100mm (3.94mil)" at 94.642,64.172 h1.52
  text "PTH" at 106.195,64.172 h1.52
  text "Round" at 111.613,64.172 h1.52
  text "Top Layer - Bottom Layer" at 119.35,64.172 h1.52
  text "Via" at 133.685,64.172 h1.52
  text "Rounded" at 140.081,64.172 h1.52
  text "v25h10m0mx0" at 148.333,64.172 h1.52
  text "-" at 197.528,64.172 h1.52
  text "-" at 208.997,64.172 h1.52
  text "4" at 89.318,61.064 h1.52
  text "0.100mm (3.94mil)" at 94.642,61.064 h1.52
  text "PTH" at 106.195,61.064 h1.52
  text "Round" at 111.613,61.064 h1.52
  text "Top Layer - Bottom Layer" at 119.35,61.064 h1.52
  text "Via" at 133.685,61.064 h1.52
  text "Rounded" at 140.081,61.064 h1.52
  text "v25h10m0mx0" at 148.333,61.064 h1.52
  text "-" at 197.528,61.064 h1.52
  text "-" at 208.997,61.064 h1.52
  text "4" at 89.318,57.956 h1.52
  text "0.300mm (11.81mil)" at 94.642,57.956 h1.52
  text "PTH" at 106.195,57.956 h1.52
  text "Round" at 111.613,57.956 h1.52
  text "Top Layer - Bottom Layer" at 119.35,57.956 h1.52
  text "Via" at 133.685,57.956 h1.52
  text "Rounded" at 140.081,57.956 h1.52
  text "v60h30m0mx0" at 148.333,57.956 h1.52
  text "-" at 197.528,57.956 h1.52
  text "-" at 208.997,57.956 h1.52
  text "6" at 89.318,54.848 h1.52
  text "0.500mm (19.69mil)" at 94.642,54.848 h1.52
  text "PTH" at 106.195,54.848 h1.52
  text "Round" at 111.613,54.848 h1.52
  text "Top Layer - Bottom Layer" at 119.35,54.848 h1.52
  text "Pad" at 133.685,54.848 h1.52
  text "Rounded" at 140.081,54.848 h1.52
  text "c75h50m0mx0" at 148.333,54.848 h1.52
  text "-" at 197.528,54.848 h1.52
  text "-" at 208.997,54.848 h1.52
  text "6" at 89.318,51.74 h1.52
  text "0.991mm (39.02mil)" at 94.642,51.74 h1.52
  text "NPTH" at 106.195,51.74 h1.52
  text "Round" at 111.613,51.74 h1.52
  text "Top Layer - Bottom Layer" at 119.35,51.74 h1.52
  text "Pad" at 133.685,51.74 h1.52
  text "Rounded" at 140.081,51.74 h1.52
  text "c65hn99m0mx0" at 148.333,51.74 h1.52
  text "-" at 197.528,51.74 h1.52
  text "-" at 208.997,51.74 h1.52
  text "8" at 89.318,48.631 h1.52
  text "1.000mm (39.37mil)" at 94.642,48.631 h1.52
  text "PTH" at 106.195,48.631 h1.52
  text "Round" at 111.613,48.631 h1.52
  text "Top Layer - Bottom Layer" at 119.35,48.631 h1.52
  text "Pad" at 133.685,48.631 h1.52
  text "(Mixed)" at 140.081,48.631 h1.52
  text "(Mixed)" at 148.333,48.631 h1.52
  text "-" at 197.528,48.631 h1.52
  text "-" at 208.997,48.631 h1.52
  text "49" at 89.318,45.523 h1.52
  text "0.200mm (7.87mil)" at 94.642,45.523 h1.52
  text "PTH" at 106.195,45.523 h1.52
  text "Round" at 111.613,45.523 h1.52
  text "Top Layer - Bottom Layer" at 119.35,45.523 h1.52
  text "Via" at 133.685,45.523 h1.52
  text "Rounded" at 140.081,45.523 h1.52
  text "(Mixed)" at 148.333,45.523 h1.52
  text "-" at 197.528,45.523 h1.52
  text "-" at 208.997,45.523 h1.52
  text "Slot definitions :" at 83.197,43.348 h1.52
  text "Routed Path Length" at 91.758,43.348 h1.52
  text "= Calculated from tool start centre position to tool end centre position." at 102.323,43.348 h1.52
  text "Hole Length" at 91.758,42.105 h1.52
  text "= Routed Path Length + Tool Size = Slot length as defined in the PCB layout" at 98.467,42.105 h1.52

## Text inside footprints (layer, text, board x,y; h text height)
J13: Mechanical 10 "Edge of PCB" at -0.825,12.351 h0.8 r270